# Altium PCB ALTAIR_PD_Sergeant_V26.4c.PcbDoc (part 4 of 4)
Units mm, origin at the board's own origin, x right, y up, seen from the top; angles counter-clockwise.
Board outline 74 x 56 mm, 4 copper layers (Top Layer, Layer 1, Layer 2, Bottom Layer), stack 1.675 mm thick; 239 components, 159 nets, 760 pads, 127 vias.
Unrouted connection lines stored in the file: 489.
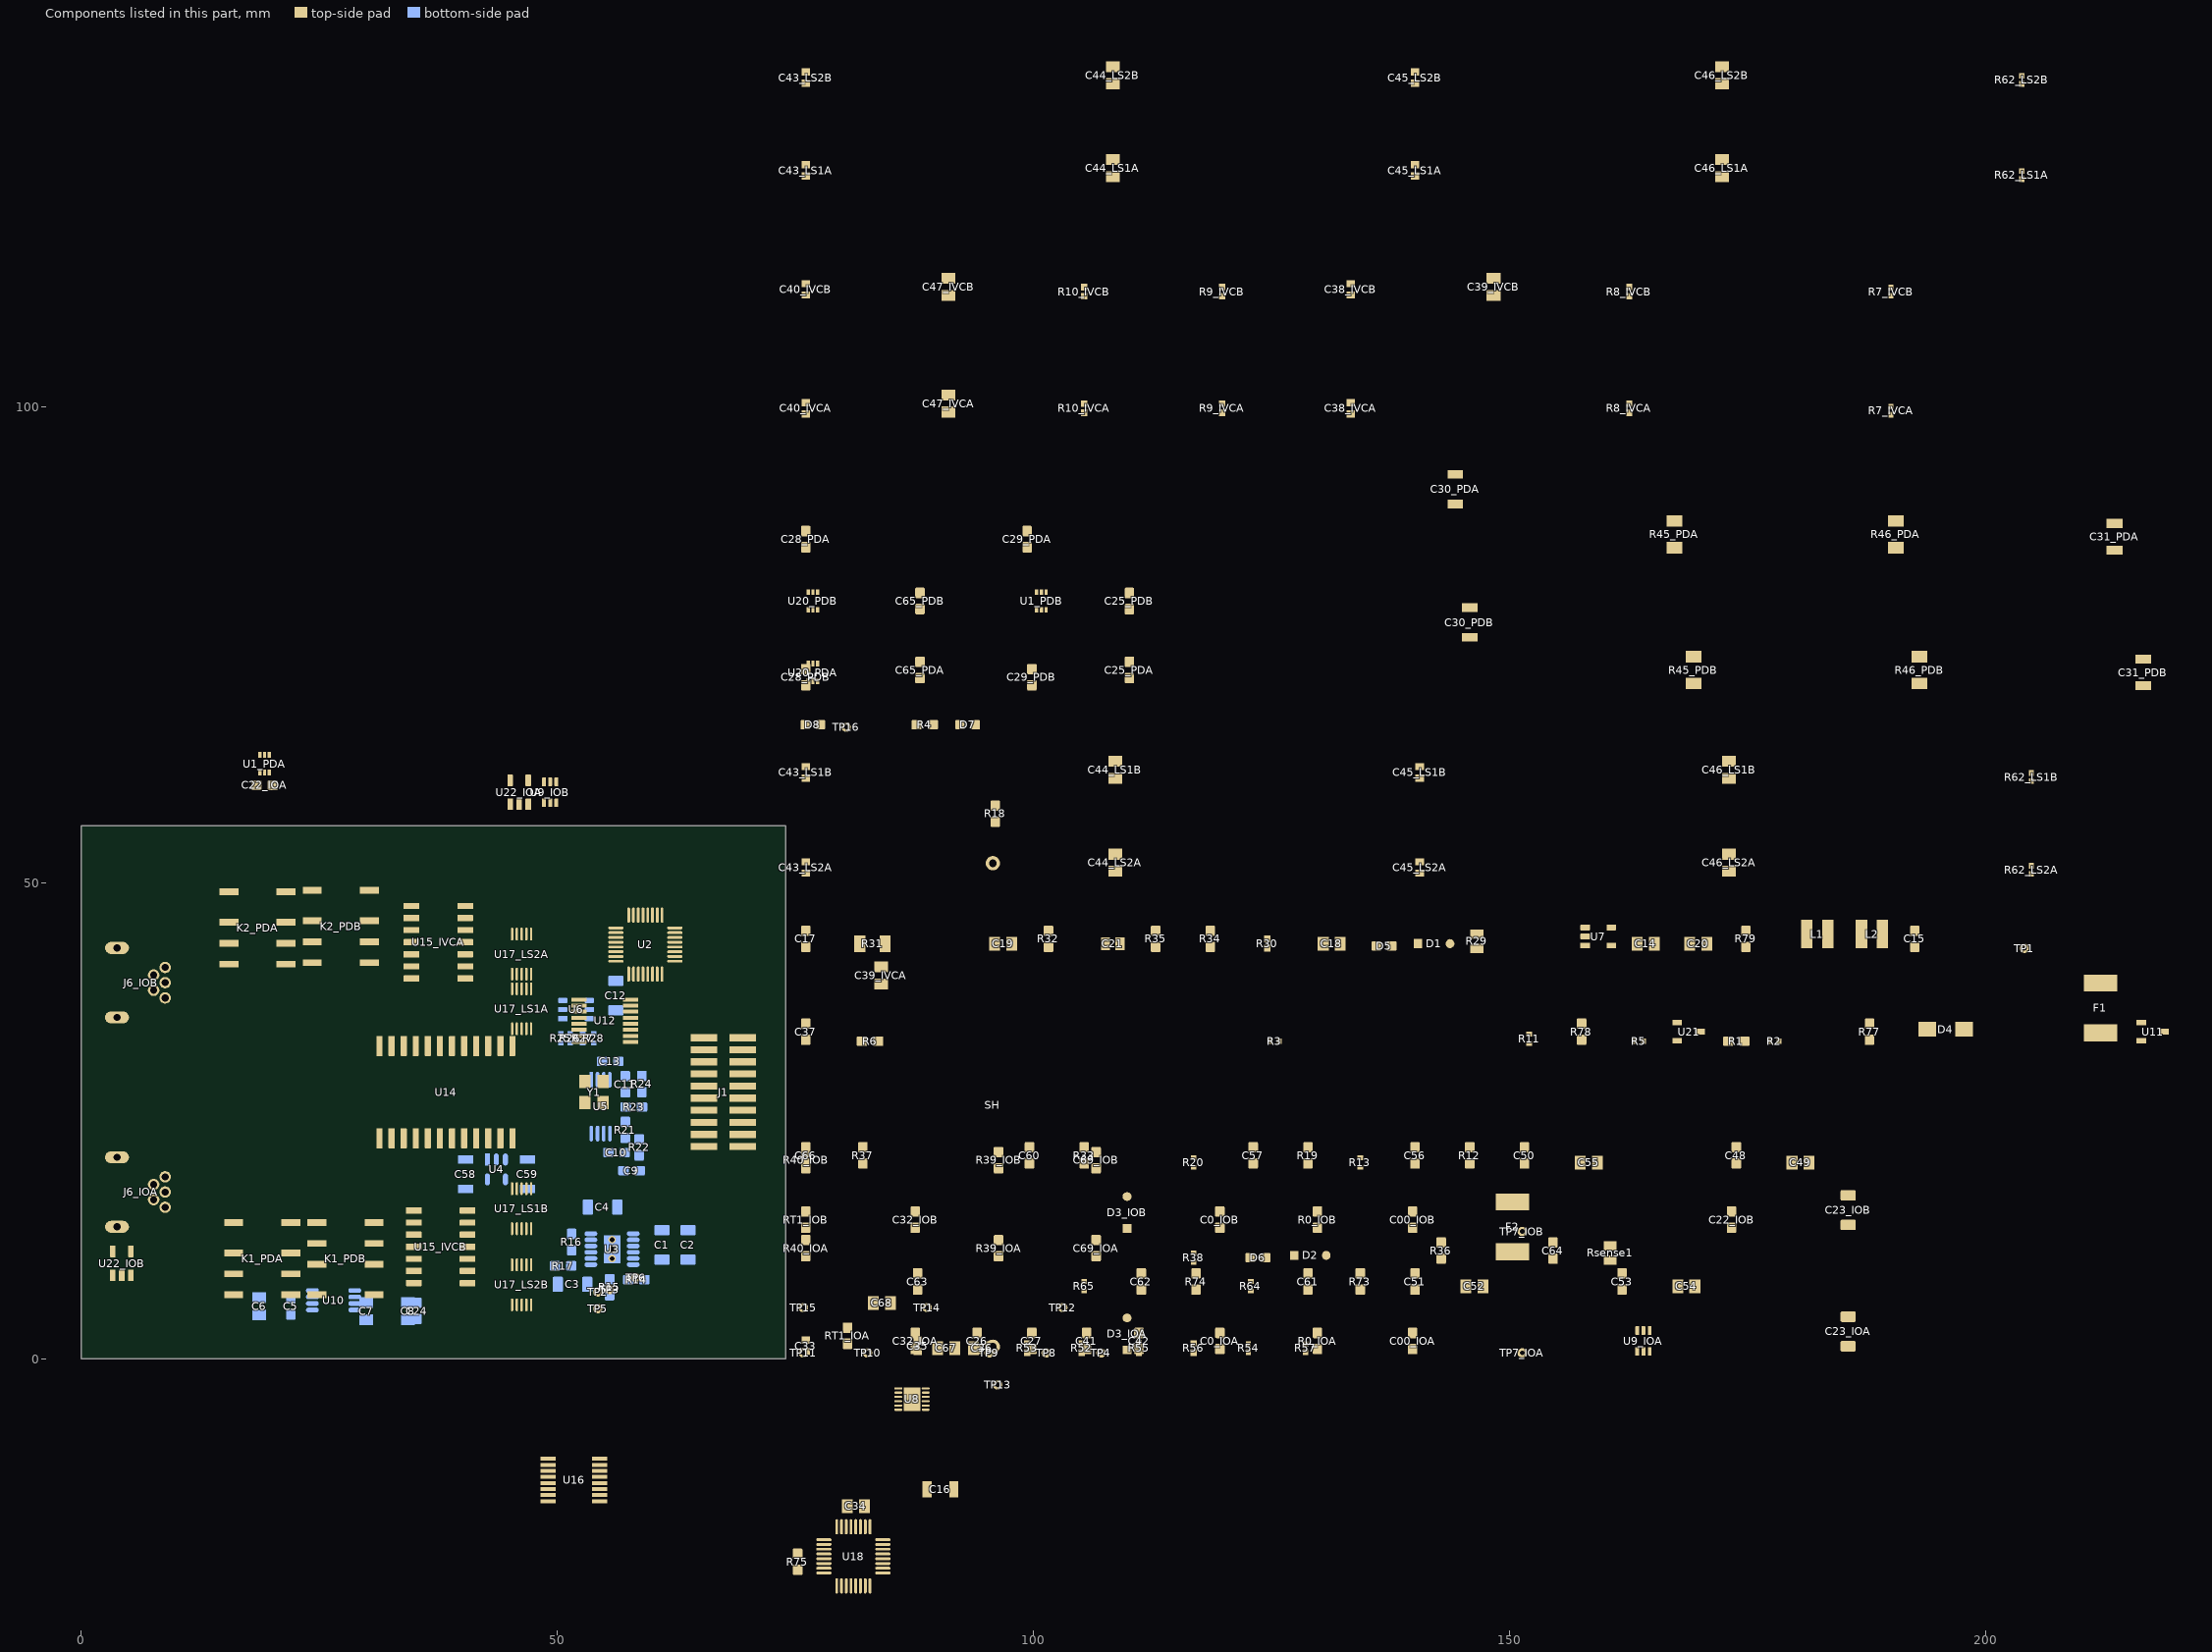
[diagram p5: the components of this part, seen from the top]

## Silkscreen, mask and mechanical layers (free items; w line width, h text height)
Top Overlay:
  drawing of 8 lines, arcs and shapes, not listed
  text "Squad" at 44.217,96.173 h2
  text "ALTAIR PDRO" at 31.61,96.095 h2
  text ".Revision" at 36.624,94.372 h1.5
  text "D.R., / P.D.B., / N.S." at 36.86,89.451 h2
  text "UVIC" at 31.96,87.795 h2
  text "WayWayWay" at 70.533,66.7 h0.8 r90
  text "ACF" at 29.326,49.333 h0.8
  text "PHOTODIODE / IN/OUT" at 1.578,32.75 h0.8
  text "IVC" at 27.1,32.608 h0.8
  text "VGND Isolators" at 52.85,32.608 h0.8
  text "Bias" at 42.821,23.063 h0.8
  text "Level Shift Amps" at 31.497,20.483 h0.8
  text "AA Filters" at 42.898,16.28 h0.8
  text "ADC" at 51.687,16.218 h0.8
  text "CLK / OUT" at 64.056,14.309 h0.8
  text "2.5Adc" at 60.3,13.708 h0.8
  text "5VSW" at 20.4,13.61 h0.8
  text "4v9" at 25.4,13.51 h0.8
  text "BiasV" at 20.411,11.524 h0.8
  text "-11V" at 24.9,11.4 h0.8
  text "10V" at 20.411,9.224 h0.8
  text "2.5V" at 24.9,9.108 h0.8
  text "TIA" at 2.641,8.34 h0.8
  text "2.5Vref" at 19.234,7.701 h0.8
  text "AMP OUT" at 38.456,7.708 h0.8
  text "AVDD" at 44.359,2.151 h0.8
Bottom Overlay:
  lines w0.2: 31.6,53.9 31.6,45.8 31.7,45.7 44.1,45.7 ; 44.1,54 44.1,43.9 ; 45.8,14.9 45.8,2.1 48.6,2.1 65.2,2.1 65.2,11.5 65.2,17.5 48.3,17.5 48.2,17.5 ; 49,33.5 49.5,34 ; 49,34 49.5,34 ; 49,34.5 49.5,34 ; 57.715,41.393 57.715,33.535 57.75,33.5 59,33.5 60,33.5 ; 59.3,32.4 60,32.4 60,31.7 ; 59.75,41.75 59.4,41.4 59,41.4 54.9,41.4 52.4,43.9 44.1,43.9 ; 60,26 63,26 ; 63,17.5 63,33.5 ; 63.75,45.75 65.6,47.6 65.6,47.85 65.6,48 65.6,53.9 ; 44.1,43.9 44.1,43.9 ; 48.2,17.5 48.2,15 48.1,14.9 47.4,14.9 38.4,14.9 38.4,21.7 38.4,22.1 48.2,22.1 48.2,21.7 48.2,17.5 ; 49.5,34 49.5,34
  text "-16V" at 65.4,53.008 h0.8
  text "-11V Regulator" at 39.2,46.051 h0.8
  text "VGND" at 62.9,32.608 h0.8
  text "5VSW" at 62.9,17.61 h0.8
  text "10V Regulator" at 65.1,16.551 h0.8
  text "TP4" at 50.7,16.2 h0.8
  text "TP8" at 62.3,15.2 h0.8
  text "AVDD 5V" at 48.1,15.008 h0.8
  text "TP5" at 26.7,14.7 h0.8
  text "TP6" at 23,14.6 h0.8
  text "4v9" at 26.7,13.71 h0.8
  text "5VSW" at 23.5,13.61 h0.8
  text "TP1" at 26.7,12.4 h0.8
  text "TP7" at 23.1,12.3 h0.8
  text "-11V" at 26.8,11.3 h0.8
  text "BiasV" at 23.3,11.208 h0.8
  text "TP2" at 26.7,9.9 h0.8
  text "TP3" at 23,9.8 h0.8
  text "10V" at 22.8,8.708 h0.8
  text "2.5V" at 26.7,8.708 h0.8
  text "TP9" at 51.2,3.9 h0.8

## Dimensions
74,0 to 74,56 on Mechanical 1
0,0 to 74,0 on Mechanical 1

## Text inside footprints (layer, text, board x,y; h text height)
J6_IOA: Mechanical 13 "PCB EDGE" at 2,12.75 h1.02 r270
J6_IOB: Mechanical 13 "PCB EDGE" at 2,34.75 h1.02 r270